# Altium PCB DCDC.PcbDoc
Units mm, origin at the board's own origin, x right, y up, seen from the top; angles counter-clockwise.
Board outline 52.96 x 29.21 mm, 2 copper layers (Top Layer, Bottom Layer); 28 components, 16 nets, 71 pads, 71 vias.
Unrouted connection lines stored in the file: 3.
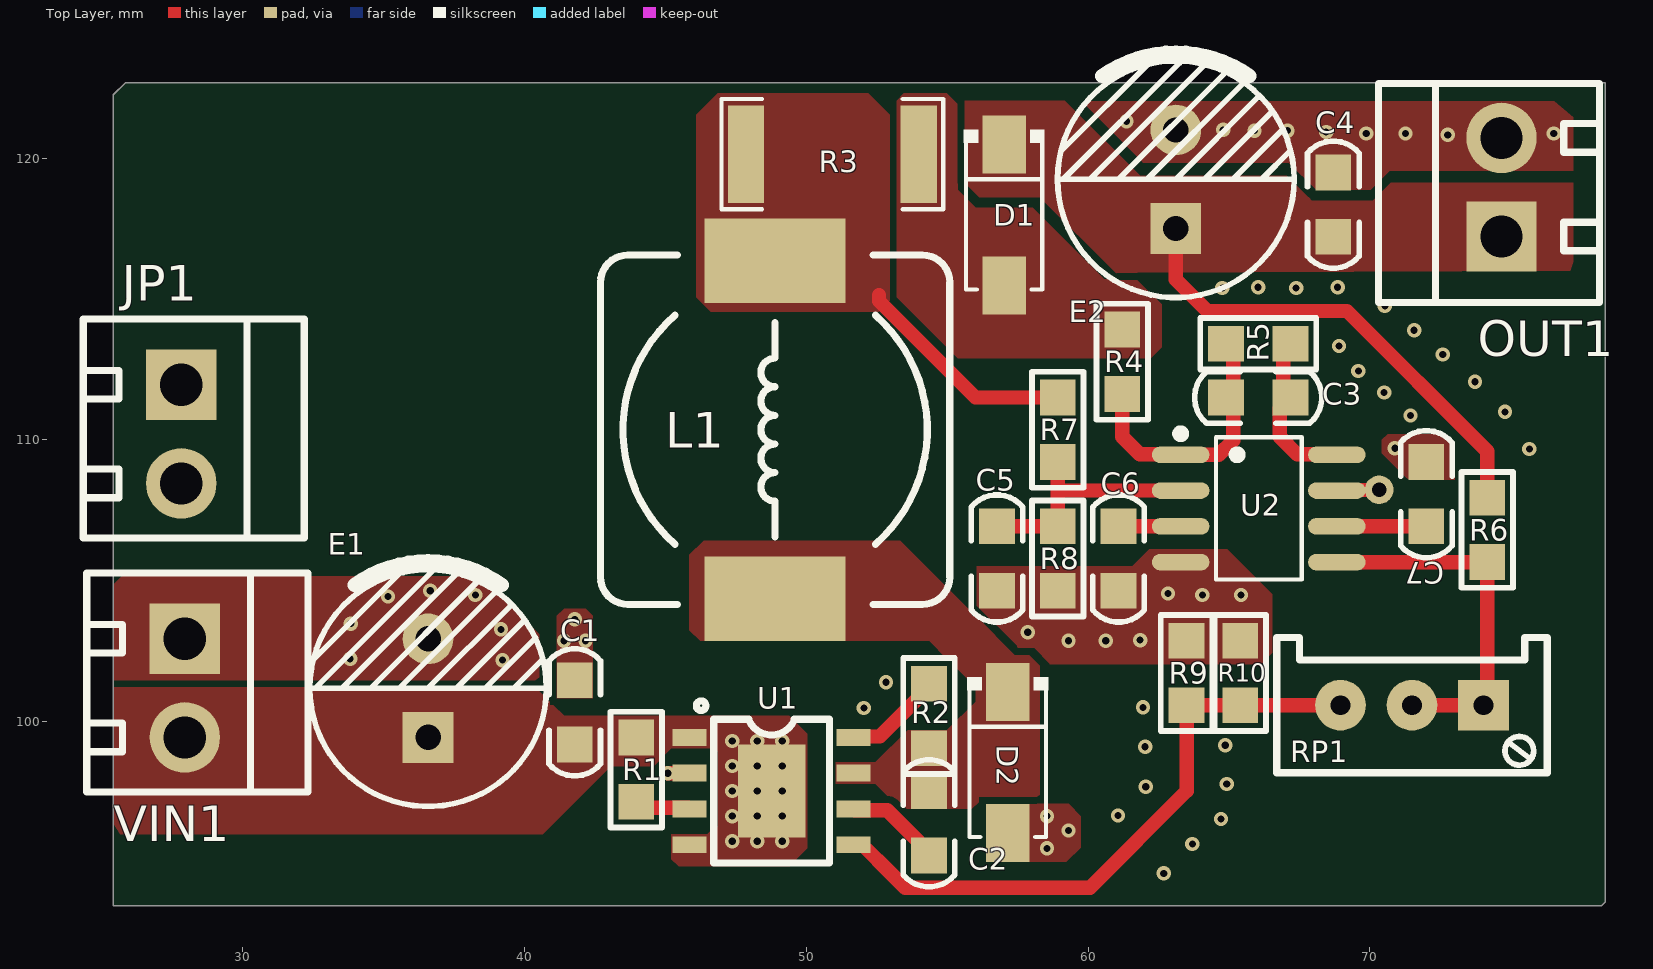
[diagram p0: Top Layer view]
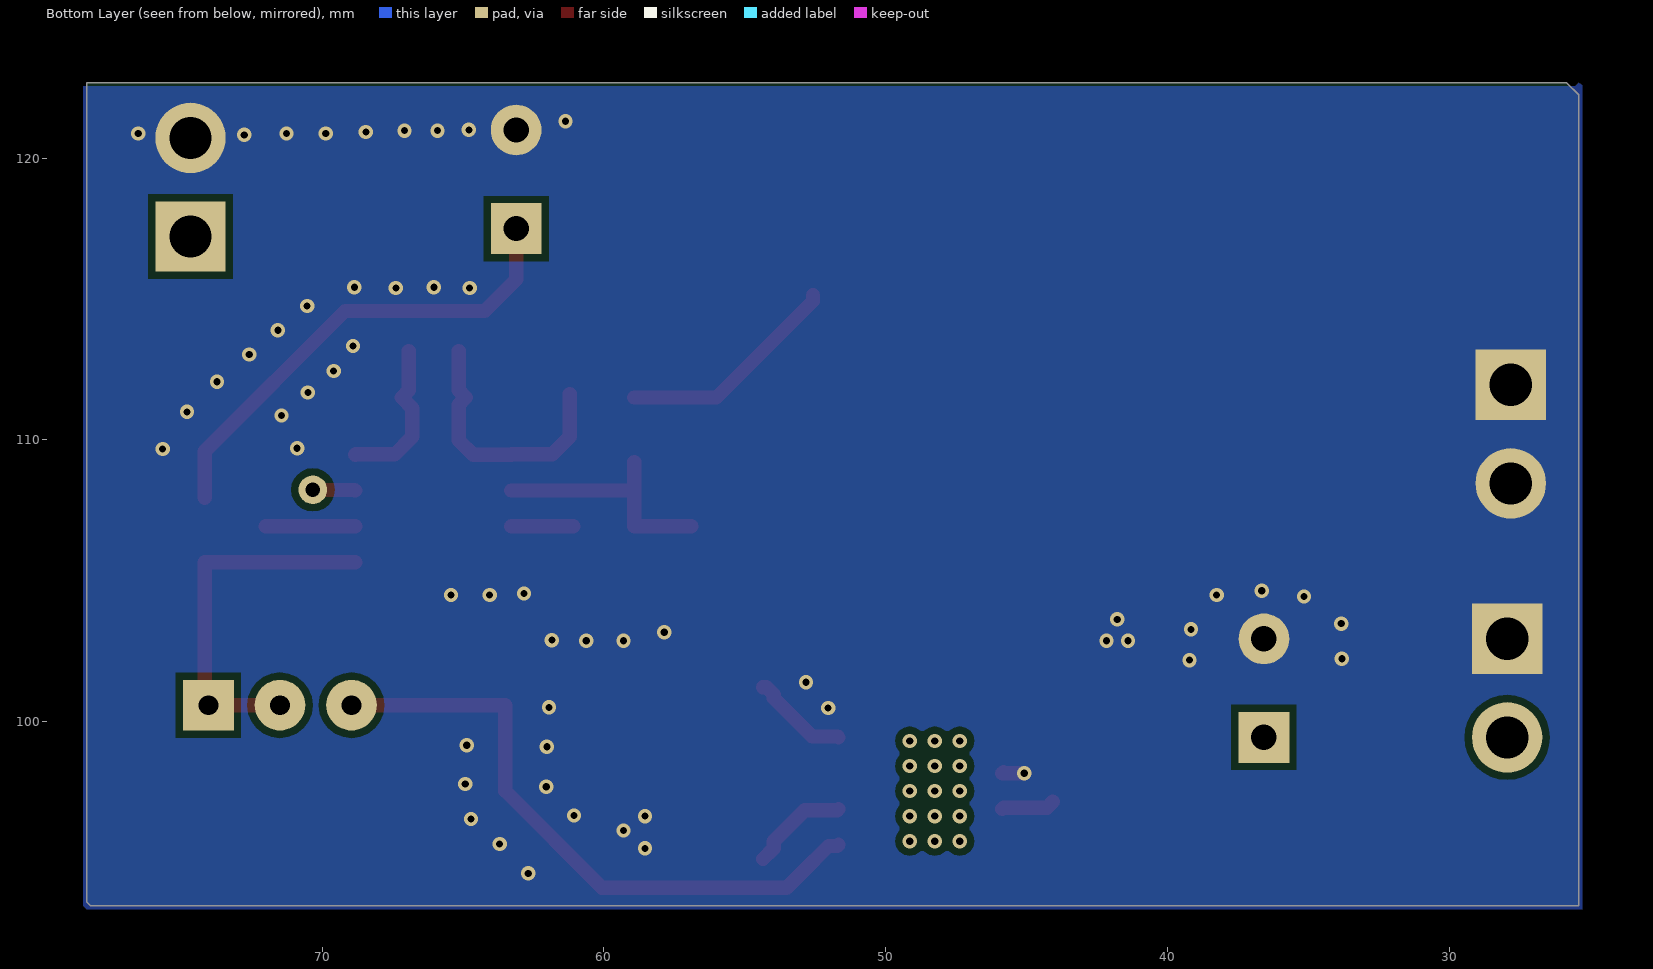
[diagram p1: Bottom Layer view, seen from below]

## Layer stack, top to bottom
Top Solder: solder mask 0.0102, Solder Resist, Dk 3.5
Top Layer: signal copper 0.0356
Dielectric 1: dielectric 0.32, FR-4, Dk 4.8
Bottom Layer: signal copper 0.0356
Bottom Solder: solder mask 0.0102, Solder Resist, Dk 3.5

## Board outline
25.4,93.472 25.4,122.25 25.832,122.682 78.359,122.682 78.359,93.599 78.232,93.472

## Design rules (kind name [scope] priority, off if disabled: settings)
Clearance [All] p1: gap=0.254 ignorepadtopadclearanceinfootprint=FALSE except(0: Arc-Hole Track-Hole SMDPad-Hole THPad-Hole Via-Hole Fill-Hole Poly-Hole Region-Hole Text-Hole)
PolygonConnect PolygonConnect_31 [All vs IsNamedPolygon('NONET_L-01_P-001')] p1: connectstyle=Direct reliefconductorwidth=0.254 reliefentries=4 polygonreliefangle="90 Angle" airgapwidth=0.254
PolygonConnect PolygonConnect_30 [All vs IsNamedPolygon('NONET_L-01_P-001')] p2: connectstyle=Direct reliefconductorwidth=0.254 reliefentries=4 polygonreliefangle="90 Angle" airgapwidth=0.254
PolygonConnect PolygonConnect_29 [All vs IsNamedPolygon('NONET_L-01_P-001')] p3: connectstyle=Direct reliefconductorwidth=0.254 reliefentries=4 polygonreliefangle="90 Angle" airgapwidth=0.254
PolygonConnect PolygonConnect_28 [All vs IsNamedPolygon('NONET_L-01_P-001')] p4: connectstyle=Direct reliefconductorwidth=0.254 reliefentries=4 polygonreliefangle="90 Angle" airgapwidth=0.254
PolygonConnect PolygonConnect_27 [All vs IsNamedPolygon('NONET_L-01_P-001')] p5: connectstyle=Direct reliefconductorwidth=0.254 reliefentries=4 polygonreliefangle="90 Angle" airgapwidth=0.254
PolygonConnect PolygonConnect_26 [All vs IsNamedPolygon('NONET_L-01_P-001')] p6: connectstyle=Direct reliefconductorwidth=0.254 reliefentries=4 polygonreliefangle="90 Angle" airgapwidth=0.254
PolygonConnect PolygonConnect_25 [All vs IsNamedPolygon('NONET_L-01_P-001')] p7: connectstyle=Direct reliefconductorwidth=0.254 reliefentries=4 polygonreliefangle="90 Angle" airgapwidth=0.254
PolygonConnect PolygonConnect_24 [All vs IsNamedPolygon('NONET_L-01_P-001')] p8: connectstyle=Direct reliefconductorwidth=0.254 reliefentries=4 polygonreliefangle="90 Angle" airgapwidth=0.254
PolygonConnect PolygonConnect_23 [All vs IsNamedPolygon('NONET_L-01_P-001')] p9: connectstyle=Direct reliefconductorwidth=0.254 reliefentries=4 polygonreliefangle="90 Angle" airgapwidth=0.254
PolygonConnect PolygonConnect_22 [All vs IsNamedPolygon('NONET_L-01_P-001')] p10: connectstyle=Direct reliefconductorwidth=0.254 reliefentries=4 polygonreliefangle="90 Angle" airgapwidth=0.254
PolygonConnect PolygonConnect_21 [All vs IsNamedPolygon('NONET_L-01_P-001')] p11: connectstyle=Direct reliefconductorwidth=0.254 reliefentries=4 polygonreliefangle="90 Angle" airgapwidth=0.254
PolygonConnect PolygonConnect_20 [All vs IsNamedPolygon('NONET_L-01_P-001')] p12: connectstyle=Direct reliefconductorwidth=0.254 reliefentries=4 polygonreliefangle="90 Angle" airgapwidth=0.254
PolygonConnect PolygonConnect_19 [All vs IsNamedPolygon('NONET_L-01_P-001')] p13: connectstyle=Direct reliefconductorwidth=0.254 reliefentries=4 polygonreliefangle="90 Angle" airgapwidth=0.254
PolygonConnect PolygonConnect_18 [All vs IsNamedPolygon('NONET_L-01_P-001')] p14: connectstyle=Direct reliefconductorwidth=0.254 reliefentries=4 polygonreliefangle="90 Angle" airgapwidth=0.254
PolygonConnect PolygonConnect_17 [All vs IsNamedPolygon('NONET_L-01_P-001')] p15: connectstyle=Direct reliefconductorwidth=0.254 reliefentries=4 polygonreliefangle="90 Angle" airgapwidth=0.254
PolygonConnect PolygonConnect_16 [All vs IsNamedPolygon('NONET_L-01_P-001')] p16: connectstyle=Direct reliefconductorwidth=0.254 reliefentries=4 polygonreliefangle="90 Angle" airgapwidth=0.254
PolygonConnect PolygonConnect_15 [All vs IsNamedPolygon('NONET_L-01_P-001')] p17: connectstyle=Direct reliefconductorwidth=0.254 reliefentries=4 polygonreliefangle="90 Angle" airgapwidth=0.254
PolygonConnect PolygonConnect_14 [All vs IsNamedPolygon('NONET_L-01_P-001')] p18: connectstyle=Direct reliefconductorwidth=0.254 reliefentries=4 polygonreliefangle="90 Angle" airgapwidth=0.254
PolygonConnect PolygonConnect_13 [All vs IsNamedPolygon('NONET_L-01_P-001')] p19: connectstyle=Direct reliefconductorwidth=0.254 reliefentries=4 polygonreliefangle="90 Angle" airgapwidth=0.254
PolygonConnect PolygonConnect_12 [All vs IsNamedPolygon('NONET_L-01_P-001')] p20: connectstyle=Direct reliefconductorwidth=0.254 reliefentries=4 polygonreliefangle="90 Angle" airgapwidth=0.254
PolygonConnect PolygonConnect_11 [All vs IsNamedPolygon('NONET_L-01_P-001')] p21: connectstyle=Direct reliefconductorwidth=0.254 reliefentries=4 polygonreliefangle="90 Angle" airgapwidth=0.254
PolygonConnect PolygonConnect_10 [All vs IsNamedPolygon('NONET_L-01_P-001')] p22: connectstyle=Direct reliefconductorwidth=0.254 reliefentries=4 polygonreliefangle="90 Angle" airgapwidth=0.254
PolygonConnect PolygonConnect_9 [All vs IsNamedPolygon('NONET_L-01_P-001')] p23: connectstyle=Direct reliefconductorwidth=0.254 reliefentries=4 polygonreliefangle="90 Angle" airgapwidth=0.254
PolygonConnect PolygonConnect_8 [All vs IsNamedPolygon('NONET_L-01_P-001')] p24: connectstyle=Direct reliefconductorwidth=0.254 reliefentries=4 polygonreliefangle="90 Angle" airgapwidth=0.254
PolygonConnect PolygonConnect_7 [All vs IsNamedPolygon('NONET_L-01_P-001')] p25: connectstyle=Direct reliefconductorwidth=0.254 reliefentries=4 polygonreliefangle="90 Angle" airgapwidth=0.254
PolygonConnect PolygonConnect_6 [All vs IsNamedPolygon('NONET_L-01_P-001')] p26: connectstyle=Direct reliefconductorwidth=0.254 reliefentries=4 polygonreliefangle="90 Angle" airgapwidth=0.254
PolygonConnect PolygonConnect_5 [All vs IsNamedPolygon('NONET_L-01_P-001')] p27: connectstyle=Direct reliefconductorwidth=0.254 reliefentries=4 polygonreliefangle="90 Angle" airgapwidth=0.254
PolygonConnect PolygonConnect_4 [All vs IsNamedPolygon('NONET_L-01_P-001')] p28: connectstyle=Direct reliefconductorwidth=0.254 reliefentries=4 polygonreliefangle="90 Angle" airgapwidth=0.254
PolygonConnect PolygonConnect_3 [All vs IsNamedPolygon('NONET_L-01_P-001')] p29: connectstyle=Direct reliefconductorwidth=0.254 reliefentries=4 polygonreliefangle="90 Angle" airgapwidth=0.254
PolygonConnect PolygonConnect_2 [All vs IsNamedPolygon('NONET_L-01_P-001')] p30: connectstyle=Direct reliefconductorwidth=0.254 reliefentries=4 polygonreliefangle="90 Angle" airgapwidth=0.254
PolygonConnect PolygonConnect_1 [All vs IsNamedPolygon('NONET_L-01_P-001')] p31: connectstyle=Direct reliefconductorwidth=0.254 reliefentries=4 polygonreliefangle="90 Angle" airgapwidth=0.254
PolygonConnect [All] p32: connectstyle=Relief reliefconductorwidth=0.254 reliefentries=4 polygonreliefangle="90 Angle" airgapwidth=0.254
RoutingVias [All] p1: holewidth=0.711 width=1.27 viastyle="Through Hole" minholewidth=0.711 minwidth=1.27 maxholewidth=0.711 maxwidth=1.27
SolderMaskExpansion [All] p1: expansion=0.102 istentingtop=FALSE
Width [All] p1: maxlimit=2.54 minlimit=0.254 preferedwidth=0.508 minimp=50.000000 maximp=50.000000 favimp=50.000000
30 further rules are at their usual default settings.

## Components (designator, comment, footprint, x,y, rotation, side; value= is the part's Value field where it differs from the comment)
C1 "104" "C 0805" 41.783,100.33 r90 top
C2 "104" "C 0805" 54.356,96.393 r90 top
C3 "104" "C 0805" 66.04,111.506 r180 top
C4 "104" "C 0805" 68.707,118.353 r270 top
C5 "104" "C 0805" 56.769,105.791 r270 top
C6 "104" "C 0805" 61.087,105.791 r270 top
C7 "104" "C 0805" 72.009,108.077 r90 top
D1 "1N4007" SMA_L4.4-W2.8-LS5.4-R-RD 57.023,117.983 r270 top
D2 "1N5824" SMA_L4.4-W2.8-LS5.4-R-RD 57.15,98.552 r270 top
E1 "220UF" "CAP 3.5*8*11.5 - GD" 36.576,101.191 r90 top
E2 "220UF" "CAP 3.5*8*11.5 - GD" 63.119,119.253 r90 top
JP1 "HDR-1X2" KF350-2P 27.813,111.958 r270 top
L1 "TMPC1004H-1R0MG-D" CDRH127 48.895,110.363 r90 top value=1uH
OUT1 "HDR-1X2" KF350-2P 74.676,117.221 r90 top
R1 "470K" "R 0805" 43.967,98.298 r90 top
R2 "24K" "R 0805" 54.356,100.203 r90 top
R3 "0.05R" R2512 50.927,120.142 r0 top
R4 "10K" "R 0805" 61.214,112.776 r90 top
R5 "10K" "R 0805" 66.04,113.411 r180 top
R6 "2.7K" "R 0805" 74.168,106.807 r90 top
R7 "10K" "R 0805" 58.928,110.363 r90 top
R8 "10K" "R 0805" 58.928,105.791 r90 top
R9 "1K" "R 0805" 63.5,101.727 r270 top
R10 "1K" "R 0805" 65.405,101.727 r270 top
RP1 "50K" 3296W 71.501,100.584 r180 top
U1 "EG1192" ESOP-8_L4.9-W3.9-P1.27-LS6.0-BL-EP 48.768,97.536 r270 top
U2 "UCC39002D" SOIC-8_L4.9-W3.9-P1.27-LS6.0-BL 66.062,107.569 r270 top
VIN1 "HDR-1X2" KF350-2P 27.94,102.941 r270 top

## Footprints (in the part's own frame and the unit in brackets; to place one, negate y for a bottom-side part, rotate by r counter-clockwise, add the part's x,y. Pads: shape width x height; smd on the part's side, far side on the other; paste and mask are expansions set on the pad)
3296W [mm] "Precise Multi-Winding Adjustable Resistor"
  rect 1.8x1.8 hole 0.7: 1(-2.54,0)
  round 1.8 hole 0.7: 2(0,0) 3(2.54,0)
  silkscreen extent -4.8,-2.4 4.8,2.4, body extent -4.75,-2.4 4.75,2.4, height 11.52
"C 0805" [mil] "无极性贴片电容"
  rect 50x50 smd: 1(-45,0) 2(45,0)
  silkscreen extent -89,-36 89,36, body extent -39,-24 39,24, height 20
"CAP 3.5*8*11.5 - GD" [mm] "脚距3.5mm直径8mm高度11.5mm"
  rect 1.8x1.8 hole 0.9: 1(-1.75,0)
  round 1.8 hole 0.9: 2(1.75,0)
  silkscreen extent -4.2,-4.2 4.5,4.2, body extent -4,-4 4.01,4, height 11.54
CDRH127 [mm] "12*12*8mm（长宽高）"
  rect 3x5 smd: 1(-6,0) 2(6,0)
  silkscreen extent -6.2,-6.2 6.2,6.2, body extent -6,-6 6,6, height 7.8
ESOP-8_L4.9-W3.9-P1.27-LS6.0-BL-EP [mm]
  rect 0.6x1.2 smd mask+0.051: 1(-1.905,-2.908) 2(-0.635,-2.908) 3(0.635,-2.908) 4(1.905,-2.908) 5(1.905,2.908) 6(0.635,2.908) 7(-0.635,2.908) 8(-1.905,2.908)
  rect 3.3x2.4 smd mask+0.051: 9(0,0)
  silkscreen extent -3.2,-2.67 2.55,2.05
KF350-2P [mm] "可拼接端子/10A"
  rect 2.5x2.5 hole 1.5: 1(0,0)
  round 2.5 hole 1.5: 2(3.5,0)
  silkscreen extent -2.34,-3.48 5.44,4.37, body extent -2.15,-3.34 5.25,4.16, height 10
R2512 [mm]
  rect 1.283x3.456 smd mask+0.051: 1(-3.066,0) 2(3.066,0)
  silkscreen extent -3.94,-1.96 3.94,1.96
"R 0805" [mil] "1/8W贴片电阻"
  rect 50x50 smd: 1(-45,0) 2(45,0)
  silkscreen extent -81,-36 81,36, body extent -39,-25 39,25, height 20
SMA_L4.4-W2.8-LS5.4-R-RD [mm]
  rect 2.063x1.539 smd mask+0.051: 1(2.504,0) 2(-2.504,0)
  silkscreen extent -3.03,-1.43 2.65,1.43
SOIC-8_L4.9-W3.9-P1.27-LS6.0-BL [mm]
  oval 0.588x2.045 smd mask+0.051: 1(-1.905,-2.772) 2(-0.635,-2.772) 3(0.635,-2.772) 4(1.905,-2.772) 5(1.905,2.772) 6(0.635,2.772) 7(-0.635,2.772) 8(-1.905,2.772)
  silkscreen extent -2.8,-2.92 2.53,1.52

## Part data
C1 C2 C3 C4 C5 C6 C7: library part C-CC, "直插瓷片电容", BOM名称=直插瓷片电容, 学习资源=https://lmdzstyle.taobao.com/, 版权归属=黎明电子style
D1: "整流二极管", BOM名称=整流二极管, 学习资源=www.ooocke.com, 版权归属=源创客
D2: library part 1N4007, "整流二极管", BOM名称=整流二极管, 学习资源=www.ooocke.com, 版权归属=源创客
E1 E2: library part C-CAP, "直插电解电容", BOM名称=直插电解电容, 学习资源=https://lmdzstyle.taobao.com/, 版权归属=黎明电子style
JP1 OUT1 VIN1: library part "Header 2", "2P接插件", BOM名称=2P接插件, 学习资源=https://lmdzstyle.taobao.com/, 版权归属=黎明电子style
L1: DC Resistance (DCR)=3.3mΩ, JLCPCB Part Class="Extended Part", LCSC Part Name="1uH ±20% 18A 3.3mΩ", Manufacturer=TAI-TECH(台庆), Rated Current=18A, Tolerance=±20%, Add into BOM=yes, Convert to PCB=yes, Datasheet=https://atta.szlcsc.com/upload/public/pdf/source/20191023/C357241_61800E9DA33BD8AEE74ACE143FB31C9E.pdf, Device=TMPC1004H-1R0MG-D, Manufacturer Part=TMPC1004H-1R0MG-D, Name=1uH, Supplier=LCSC, Supplier Footprint=SMD, Supplier Part=C245069, Symbol=TMPC1004H-1R0MG-D
R1 R2 R4 R5 R6 R7 R8 R9 R10: library part R, "贴片电阻", BOM名称=贴片电阻, 学习资源=https://lmdzstyle.taobao.com/, 版权归属=黎明电子style
R3: library part R-I, "电流检测电阻", BOM名称=电流检测电阻, 学习资源=https://lmdzstyle.taobao.com/, 版权归属=黎明电子style
RP1: library part RP-ID, "插件单联电位器", BOM名称=插件电位器, 学习资源=https://lmdzstyle.taobao.com/, 版权归属=黎明电子style
U1: JLCPCB Part Class="Extended Part", Manufacturer=EG(屹晶微), Add into BOM=yes, Convert to PCB=yes, Datasheet=https://atta.szlcsc.com/upload/public/pdf/source/20211210/B01B7477DA9546BB1894AF17BC5F9B4C.pdf, Device=EG1192, LCSC Part Name=EG1192, Manufacturer Part=EG1192, Name=EG1192, Supplier=LCSC, Supplier Footprint=ESOP-8, Supplier Part=C2929084, Symbol=EG1192
U2: JLCPCB Part Class="Extended Part", Manufacturer=TI(德州仪器), Add into BOM=yes, Convert to PCB=yes, Device=UCC39002D, LCSC Part Name=UCC39002D, Manufacturer Part=UCC39002D, Name=UCC39002D, Supplier=LCSC, Supplier Footprint=SOIC-8, Supplier Part=C1574949, Symbol=UCC39002D

## Free pads (board coordinates)
  round 1.016 hole 0.508: 2(70.333,108.229)

## Via types
v1: diameter 0.508, hole 0.254, Top Layer to Bottom Layer, 71 vias

## Nets (pads, with @x,y where several pads share a name; then routed paths per layer and width w, separated by ;. In a path a pad name is that pad's centre, name@x,y a point inside that pad or via, vN(x,y) a via of type N, cw(c..) or ccw(c..) an arc to the next point about the centre after c; other vN are vias at no path point)
GND: C1.2 C4.1 C5.2 C6.2 C7.2 D2.1 E1.2 E2.2 JP1.1 JP1.2 OUT1.2 R8.1 R9.1 R10.1 U1.2 U2.4 VIN1.1 | length 0.8
  Top Layer w0.508: v1(45.085,98.171) U1.2 U1.2@45.818,98.213
  other v1: 62.687,94.615 58.547,95.504 63.703,95.656 59.309,96.139 64.719,96.545 58.547,96.647 61.062,96.672 62.052,97.688 64.922,97.79 62.027,99.111 64.872,99.162 52.045,100.482 61.951,100.508 52.832,101.397 39.218,102.184 33.807,102.235 41.402,102.87 42.164,102.87 59.309,102.87 60.63,102.87 61.849,102.895 57.861,103.175 39.167,103.276 33.833,103.48 41.783,103.632 35.154,104.445 38.252,104.496 64.059,104.496 65.43,104.496 62.84,104.546 36.652,104.648 75.667,109.677 70.891,109.703 71.45,110.871 74.803,110.998 70.51,111.684 73.736,112.065 69.596,112.446 72.593,113.03 68.91,113.335 71.577,113.894 70.536,114.757 64.77,115.392 67.386,115.392 66.04,115.418 68.859,115.418 72.771,120.828 69.875,120.879 71.272,120.879 76.53,120.879 68.453,120.929 65.913,120.98 67.081,120.98 64.795,121.006 61.366,121.31
NetC2_1: C2.1 U1.6 | length 3.6
  Top Layer w0.508: U1.6 51.722,96.855 52.878,96.855 53.975,95.758 53.975,95.504 C2.1@54.356,95.123
NetC2_2: C2.2 D2.2 L1.1 R2.1 U1.7
NetC3_1: C3.1 R5.1 U2.8 | length 5.6
  Top Layer w0.508: R5.1@66.929,113.157 66.929,111.76 C3.1 66.802,111.125 66.802,110.109 67.422,109.489 68.819,109.489 U2.8
NetC3_2: C3.2 R4.1 R5.2 U2.1 | length 9.3
  Top Layer w0.508: R4.1 61.214,110.109 61.834,109.489 63.274,109.489 U2.1 64.643,109.474 65.151,109.982 65.151,111.252 C3.2 65.151,111.76 R5.2@65.151,113.157
NetC4_2: C4.2 D1.2 E2.1 OUT1.1 R6.2 | length 17
  Top Layer w0.508: E2.1 63.119,115.697 64.237,114.579 69.19,114.579 74.168,109.601 R6.2
NetC5_1: C5.1 R7.1 R8.2 U2.2 | length 8.7
  Top Layer w0.508: C5.1@56.896,106.934 R8.2 58.928,108.077 ; R7.1 58.928,108.077 ; U2.2 59.055,108.204 58.928,108.077
NetC6_1: C6.1 L1.2 R3.1 R7.2 U2.3 | length 10.2
  Top Layer w0.508: 52.578,115.138 52.578,114.935 56.007,111.506 R7.2 ; C6.1 U2.3
NetC7_1: C7.1 U2.6 | length 3.2
  Top Layer w0.508: U2.6 C7.1
NetD1_1: D1.1 R3.2 R4.2
NetR1_1: R1.1 U1.3 | length 1.9
  Top Layer w0.508: R1.1@44.069,97.155 44.277,96.947 45.814,96.947 U1.3
NetR2_2: R2.2 U1.8 | length 3.5
  Top Layer w0.508: U1.8 51.706,99.471 52.608,99.471 53.975,100.838 53.975,100.965 54.229,101.219 R2.2@54.356,101.219
NetR6_1: R6.1 RP1.1 RP1.2 U2.5 | length 13
  Top Layer w0.508: U2.5 R6.1 74.168,100.711 RP1.1 RP1.2
NetR9_2: R9.2 R10.2 RP1.3 U1.5 | length 22.6
  Top Layer w0.508: U1.5 51.722,95.585 52.033,95.585 52.981,94.637 53.511,94.107 60.071,94.107 63.5,97.536 R9.2 R10.2 RP1.3 RP1.3@68.834,100.711
NetU2_7: pad.2 U2.7 | length 1.5
  Top Layer w0.508: U2.7 68.849,108.219 pad.2
vin+: C1.1 E1.1 R1.2 U1.1 U1.4 U1.9 VIN1.2
  other v1: 47.371,95.758 48.26,95.758 49.149,95.758 47.371,96.647 48.26,96.647 49.149,96.647 47.371,97.536 48.26,97.536 49.149,97.536 47.371,98.425 48.26,98.425 49.149,98.425 47.371,99.314 48.26,99.314 49.149,99.314

## Polygon pours and split planes (outlines as drawn)
NetC6_1 on Top Layer "NONET_L-01_P-001" (solid, pour order 9): 46.609,114.554 46.101,115.062 46.101,121.539 46.863,122.301 52.197,122.301 52.959,121.539 52.959,114.935 52.578,114.554
GND on Top Layer "NONET_L-01_P-001" (solid, pour order 17): 25.4,104.851 25.705,105.156 38.456,105.156 40.513,103.099 40.513,101.448 25.4,101.448
NetC4_2 on Top Layer "NONET_L-01_P-001" (solid, pour order 6): 56.134,118.618 58.293,118.618 60.985,115.926 77.114,116.002 77.216,116.332 77.216,119.126 70.739,119.126 70.104,118.491 67.945,118.491 67.056,119.38 61.849,119.38 59.182,122.047 55.626,122.047 55.626,119.126
GND on Top Layer "NONET_L-01_P-001" (solid, pour order 16): 59.792,122.022 61.951,119.863 61.951,119.837 67.132,119.837 68.097,118.872 70.028,118.872 70.714,119.558 77.216,119.558 77.216,121.463 76.556,122.022 76.454,122.022
GND on Top Layer "NONET_L-01_P-001" (solid, pour order 15): 71.374,108.585 70.434,109.525 70.434,110.007 70.637,110.211 72.644,110.211 73.025,109.83 73.025,108.585 71.399,108.585 71.374,108.56
GND on Top Layer "NONET_L-01_P-001" (solid, pour order 14): 56.058,105.512 61.57,105.512 62.179,106.121 64.948,106.121 66.548,104.521 66.548,102.438 66.142,102.032 58.649,102.032 58.649,102.057 58.09,102.616 57.48,102.616 57.48,102.692 56.058,104.115
GND on Top Layer "NONET_L-01_P-001" (solid, pour order 13): 56.388,97.079 59.309,97.079 59.741,96.647 59.741,95.529 59.233,95.021 56.388,95.021
GND on Top Layer "NONET_L-01_P-001" (solid, pour order 12): 41.148,100.838 41.148,103.759 41.402,104.013 42.164,104.013 42.418,103.759 42.418,100.838
NetD1_1 on Top Layer "NONET_L-01_P-001" (solid, pour order 10): 53.213,122.047 53.467,122.301 54.991,122.301 55.372,121.92 55.372,118.872 56.007,118.237 58.039,118.237 60.579,115.697 61.722,115.697 62.611,114.808 62.611,113.284 62.23,112.903 55.372,112.903 53.213,115.062
NetC2_2 on Top Layer "NONET_L-01_P-001" (solid, pour order 8): 51.054,98.552 52.451,98.552 53.594,99.695 54.991,99.695 56.007,100.711 56.007,101.219 54.356,102.87 46.228,102.87 45.847,103.251 45.847,105.918 46.355,106.426 53.34,106.426 57.404,102.362 57.912,102.362 58.293,101.981 58.293,97.409 58.166,97.282 56.261,97.282 55.88,96.901 53.34,96.901 52.451,97.79 51.054,97.79
vin+ on Top Layer "NONET_L-01_P-001" (solid, pour order 3): 44.45,100.203 49.403,100.203 50.038,99.568 50.038,95.504 49.403,94.869 45.466,94.869 45.212,95.123 45.212,96.012 46.482,96.012 46.736,96.266 46.863,96.266 46.863,98.933 46.736,99.06 45.212,99.06 44.577,98.425 44.069,98.425
vin+ on Top Layer "NONET_L-01_P-001" (solid, pour order 2): 25.4,101.219 40.386,101.219 41.402,100.203 44.831,100.203 44.831,98.806 44.45,98.425 43.053,98.425 40.64,96.012 25.654,96.012 25.4,96.393 25.4,96.52
GND on Bottom Layer "NONET_L-01_P-001" (solid, pour order 11): 25.4,122.682 25.527,122.555 78.486,122.555 78.486,93.472 78.359,93.345 25.273,93.345 25.273,122.682 25.4,122.809

## Silkscreen, mask and mechanical layers (free items; w line width, h text height)
Mechanical 13:
  lines w0.254: 25.4,93.472 25.4,122.25 25.832,122.682 78.359,122.682 78.359,95.123 78.359,93.599 78.232,93.472 25.4,93.472